# Altium PCB L-1K1W1007851A.PcbDoc
Units mm, origin at the board's own origin, x right, y up, seen from the top; angles counter-clockwise.
Board outline 50 x 50 mm, 2 copper layers (Top Layer, Bottom Layer), stack 1.58 mm thick; 57 components, 42 nets, 208 pads, 81 vias.
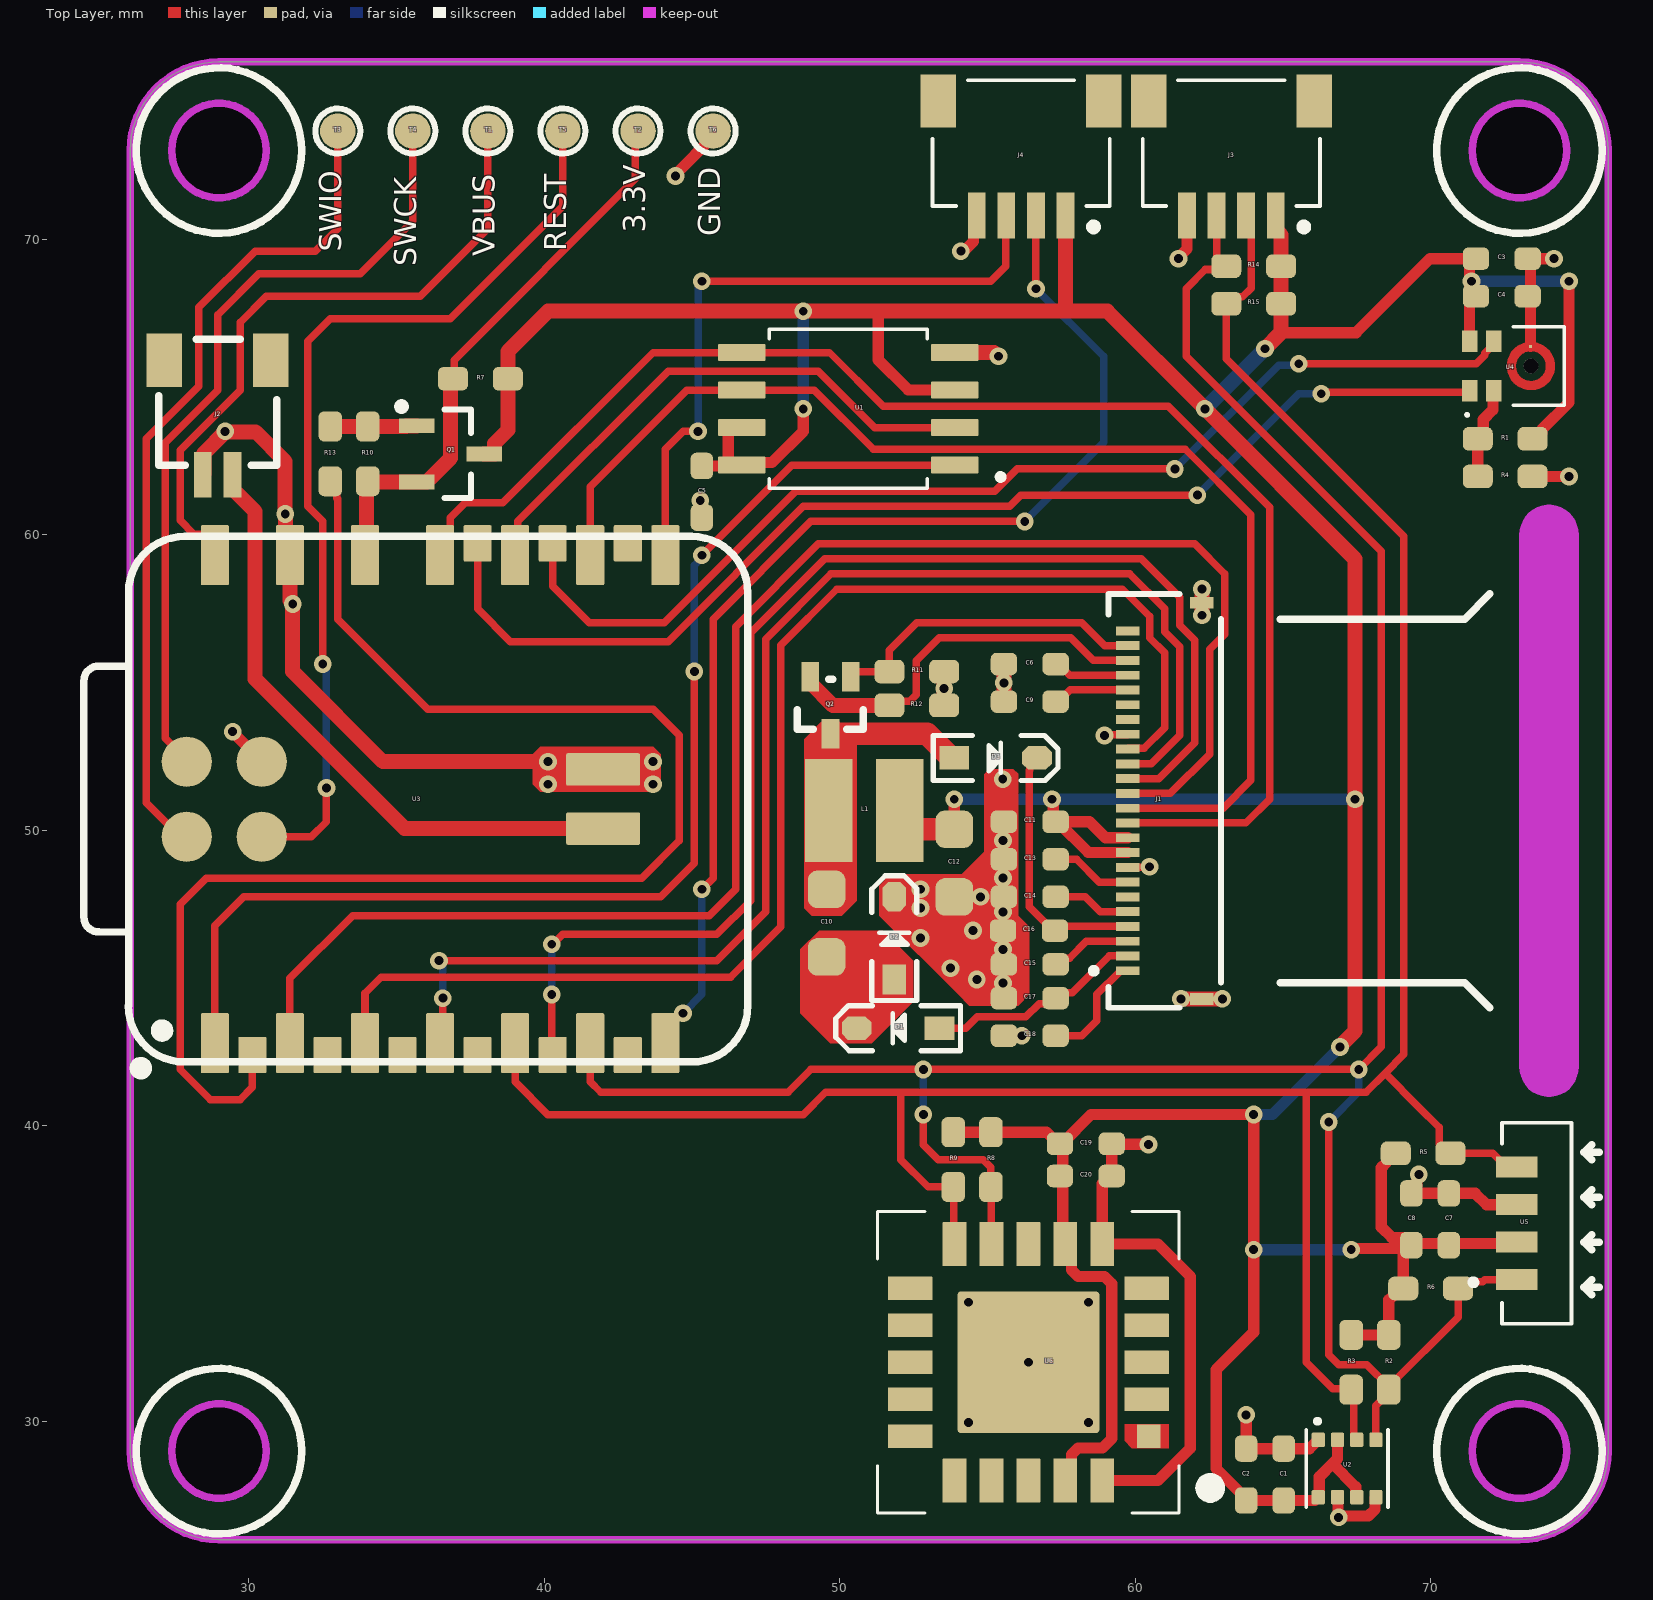
[diagram p0: Top Layer view]
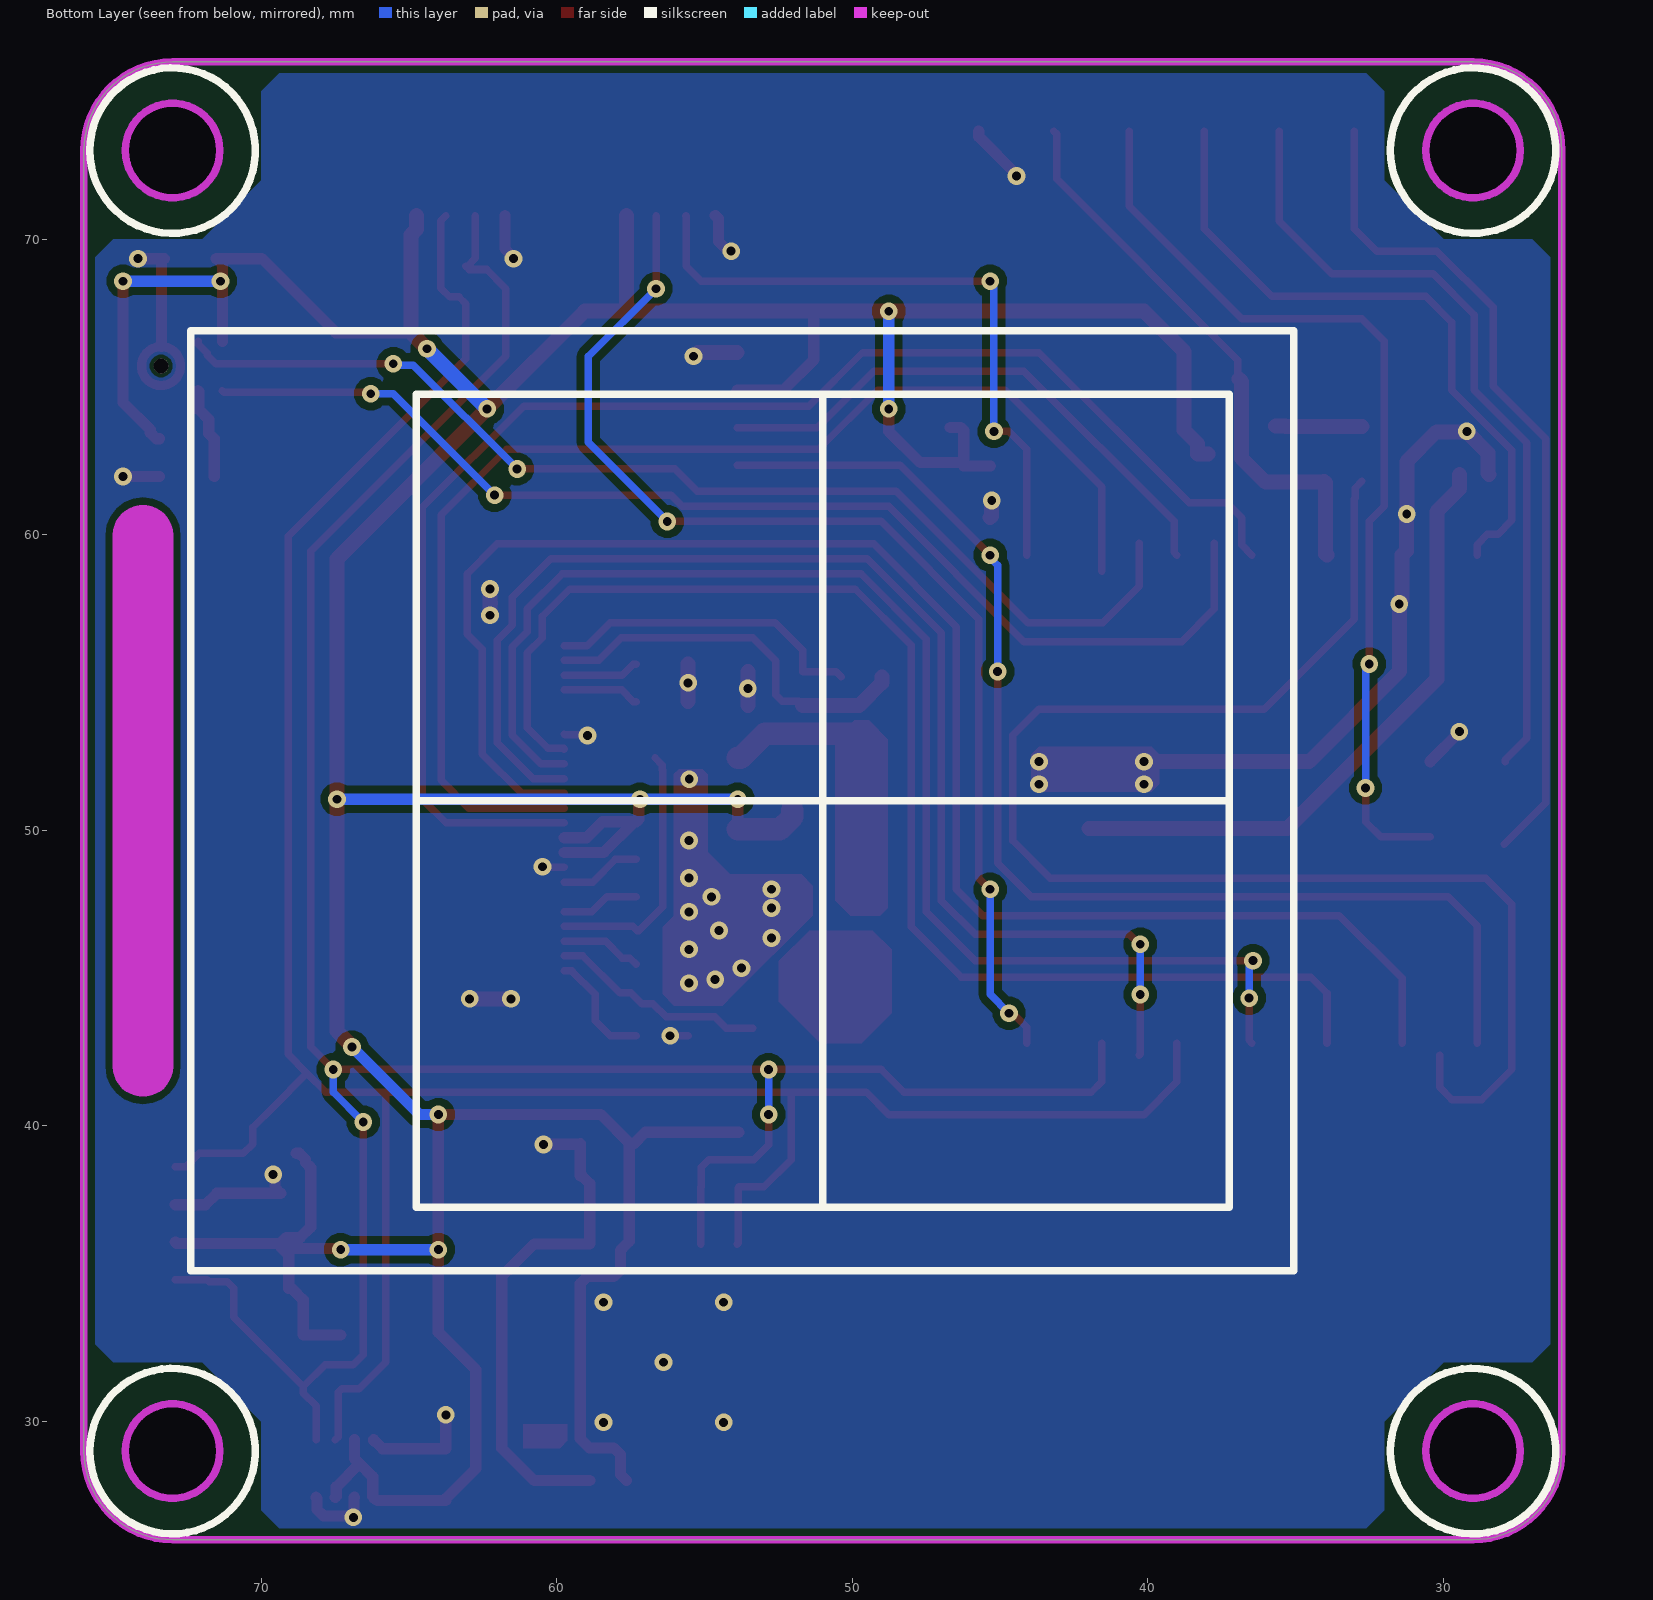
[diagram p1: Bottom Layer view, seen from below]
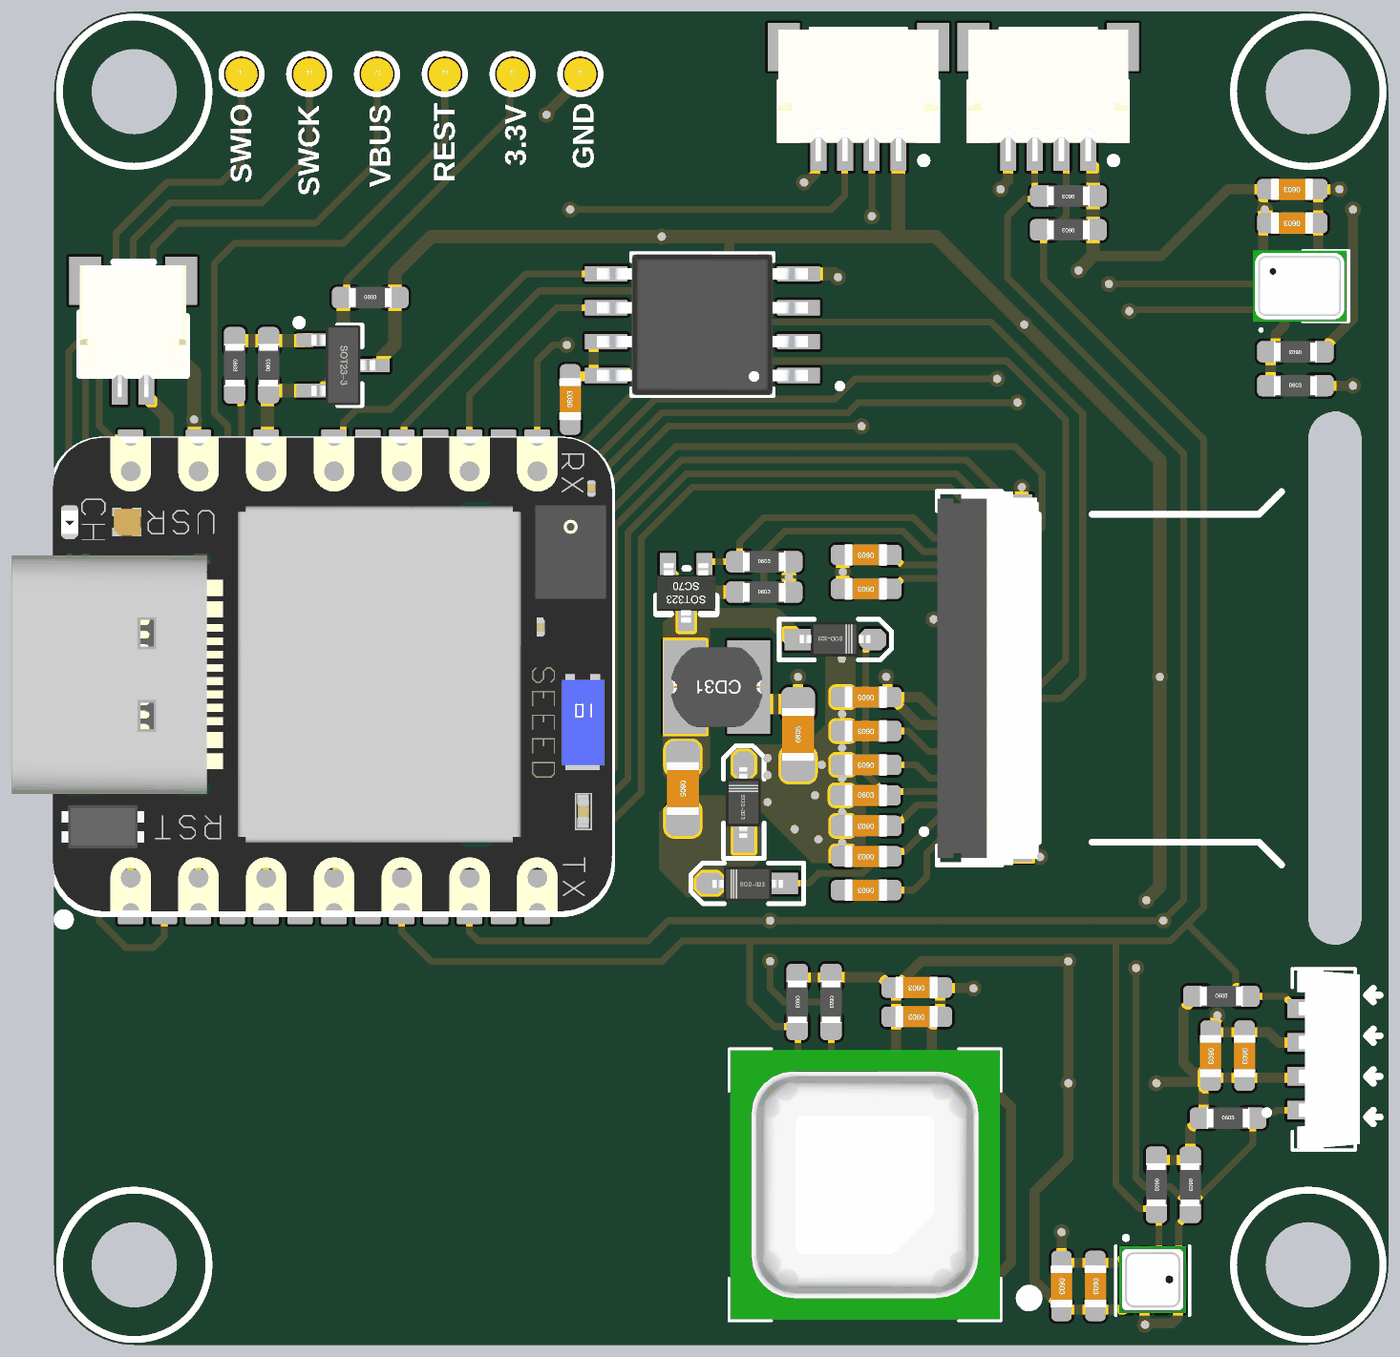
[diagram p2: 3D render of the assembled board from above, using the file's embedded part models]

## Layer stack, top to bottom
Top Solder: solder mask 0.0102, Solder Resist, Dk 3.5
Top Layer: signal copper 0.0356
Dielectric 1: dielectric 1.5086, FR-4, Dk 4.8
Bottom Layer: signal copper 0.0356
Bottom Solder: solder mask 0.0102, Solder Resist, Dk 3.5

## Board outline
26,29 26,73 cw(c29,73) 29,76 73,76 cw(c73,73) 76,73 76,29 cw(c73,29) 73,26 29,26 cw(c29,29)
cut-out: 73,42 ccw(c74,42) 75,42 75,60 ccw(c74,60) 73,60
cut-out: 71.4,73 cw(c73,73) 73,74.6 cw(c73,73) 74.6,73 cw(c73,73) 73,71.4 cw(c73,73)
cut-out: 73,30.6 cw(c73,29) 74.6,29 cw(c73,29) 73,27.4 cw(c73,29) 71.4,29 cw(c73,29)
cut-out: 30.6,29 cw(c29,29) 29,27.4 cw(c29,29) 27.4,29 cw(c29,29) 29,30.6 cw(c29,29)
cut-out: 29,71.4 cw(c29,73) 27.4,73 cw(c29,73) 29,74.6 cw(c29,73) 30.6,73 cw(c29,73)

## Design rules (kind name [scope] priority, off if disabled: settings)
Clearance [All] p1: gap=0.127 ignorepadtopadclearanceinfootprint=FALSE except(0.254: Arc-Poly Track-Poly SMDPad-Poly THPad-Poly Via-Poly Fill-Poly Poly-Poly)
PolygonConnect [All] p1: connectstyle=Direct reliefconductorwidth=0.254 reliefentries=4 polygonreliefangle="90 Angle" airgapwidth=0.254
RoutingVias [All] p1: holewidth=0.3 width=0.6 viastyle="Through Hole" minholewidth=0.3 minwidth=0.6 maxholewidth=0.3 maxwidth=0.6
SolderMaskExpansion [All] p1: expansion=0.102 istentingtop=FALSE
SupplyNets "Schematic Supply Nets_4" [InNet('VBUS')] p1: voltage=0.000
SupplyNets "Schematic Supply Nets_3" [InNet('+3.3V_PS')] p2: voltage=0.000
SupplyNets "Schematic Supply Nets_2" [InNet('GND')] p3: voltage=0.000
SupplyNets "Schematic Supply Nets_1" [InNet('VBAT')] p4: voltage=0.000
SupplyNets "Schematic Supply Nets" [InNet('+3.3V')] p5: voltage=0.000
Width [All] p1: maxlimit=25.4 minlimit=0.127 preferedwidth=0.254
30 further rules are at their usual default settings.

## Components (designator, comment, footprint, x,y, rotation, side; value= is the part's Value field where it differs from the comment)
C1 "0.1uF/50V" "C 0603" 65.024,28.194 r270 top value=30pF
C2 "10uF/10V" "C 0603" 63.754,28.194 r270 top value=30pF
C3 "0.1uF/50V" "C 0603" 72.39,69.342 r180 top value=30pF
C4 "10uF/10V" "C 0603" 72.39,68.072 r180 top value=30pF
C5 "0.1uF/50V" "C 0603" 45.339,61.468 r90 top value=30pF
C6 "1uF/50V" "C 0603" 56.42,55.626 r180 top value=30pF
C7 "0.1uF/50V" "C 0603" 70.612,36.83 r270 top value=30pF
C8 "10uF/10V" "C 0603" 69.342,36.83 r270 top value=30pF
C9 "1uF/50V" "C 0603" 56.42,54.356 r180 top value=30pF
C10 "4.7uF/50V" "C 0805" 49.562,46.863 r270 top value=30pF
C11 "1uF/50V" "C 0603" 56.42,50.292 r180 top value=30pF
C12 "4.7uF/50V" "C 0805" 53.88,48.895 r90 top value=30pF
C13 "1uF/50V" "C 0603" 56.42,49.022 r180 top value=30pF
C14 "1uF/50V" "C 0603" 56.42,47.752 r180 top value=30pF
C15 "1uF/50V" "C 0603" 56.42,45.466 r180 top value=30pF
C16 "1uF/50V" "C 0603" 56.42,46.609 r0 top value=30pF
C17 "1uF/50V" "C 0603" 56.42,44.323 r180 top value=30pF
C18 "1uF/50V" "C 0603" 56.42,43.053 r180 top value=30pF
C19 "0.1uF/50V" "C 0603" 58.318,39.399 r180 top value=30pF
C20 "10uF/10V" "C 0603" 58.318,38.307 r180 top value=30pF
D1 "MBR0530" SOD-323 51.978,43.307 r180 top
D2 "MBR0530" SOD-323 51.848,46.355 r90 top
D3 "MBR0530" SOD-323 55.277,52.451 r0 top
J1 "HC-FPC-05-09-24RLTAG" GCT_FFC2B28-24-G 61,51 r90 top
J2 "SM02B-SRSS-TB(LF)(SN)" SM02B-SRSS-TB(LF)(SN) 28.956,64.008 r180 top
J3 "SM04B-GHS-TB(LF)(SN)" JST_SM04B-SRSS-TB(LF)(SN) 63.252,70.801 r180 top
J4 "SM04B-GHS-TB(LF)(SN)" JST_SM04B-SRSS-TB(LF)(SN) 56.14,70.801 r180 top
L1 "10uH/1A" CD31 50.832,50.673 r180 top
Q1 "AO3401" SOT23-3N 36.83,62.738 r270 top
Q2 "SI1308EDL" SOT323 49.689,54.229 r180 top
R1 "NC" "R 0603" 72.517,63.246 r180 top
R2 "NC" "R 0603" 68.58,32.004 r270 top
R3 "NC" "R 0603" 67.31,32.004 r270 top
R4 "0R" "R 0603" 72.517,61.976 r0 top
R5 "NC" "R 0603" 69.742,39.074 r0 top
R6 "NC" "R 0603" 69.996,34.502 r0 top
R7 "NC" "R 0603" 37.846,65.278 r0 top
R8 "NC" "R 0603" 55.118,38.862 r270 top
R9 "NC" "R 0603" 53.848,38.862 r270 top
R10 "10K" "R 0603" 34.036,62.738 r90 top
R11 "1M" "R 0603" 52.61,55.372 r0 top
R12 "0.47R" "R 0603" 52.61,54.229 r0 top
R13 "100R" "R 0603" 32.766,62.738 r270 top
R14 "4.7K" "R 0603" 64.008,69.088 r180 top
R15 "4.7K" "R 0603" 64.008,67.818 r180 top
T1 "PAD 1.2mm" "TEST 1.2" 38.1,73.66 r180 top
T2 "PAD 1.2mm" "TEST 1.2" 43.18,73.66 r180 top
T3 "PAD 1.2mm" "TEST 1.2" 33.02,73.66 r180 top
T4 "PAD 1.2mm" "TEST 1.2" 35.56,73.66 r180 top
T5 "PAD 1.2mm" "TEST 1.2" 40.64,73.66 r180 top
T6 "PAD 1.2mm" "TEST 1.2" 45.72,73.66 r180 top
U1 "W25Q64JVSSIQ" SOIC127P790X216-8N 50.292,64.262 r180 top
U2 "BME280" PSON65P250X250X100-8N 67.168,28.409 r90 top
U3 "XIAO-nRF52840-Plus" XIAO-nRF52840-Plus 48.103,41.529 r90 top locked
U4 "SPH0641LU4H-1" MIC_SPH0641LU4H-1 73.388,65.711 r90 top
U5 "VEML7700-TR" XDCR_VEML7700-TR 73.582,36.707 r180 top
U6 "SCD41-D-R1" SCD4x 56.388,32.004 r180 top

## Footprints (in the part's own frame and the unit in brackets; to place one, negate y for a bottom-side part, rotate by r counter-clockwise, add the part's x,y. Pads: shape width x height; smd on the part's side, far side on the other; paste and mask are expansions set on the pad)
"C 0603" [mil] "无极性贴片电容"
  rrect50% 35x30 smd: 1(-35,0) 2(34,0)
  body extent -31,-16 31,16, height 32
"C 0805" [mil] "无极性贴片电容"
  rrect50% 50x50 smd: 1(-45,0) 2(45,0)
  body extent -39,-24 39,24, height 20
CD31 [mm] "3.5*3*1mm（长宽高）"
  rect 1.6x3.5 smd: 1(-1.2,0) 2(1.2,0)
  body extent -1.72,-1.5 1.72,1.5, height 1.2
GCT_FFC2B28-24-G [mm]
  rect 0.3x0.8 smd: 1(-5.75,1.25) 2(-5.25,1.25) 3(-4.75,1.25) 4(-4.25,1.25) 5(-3.75,1.25) 6(-3.25,1.25) 7(-2.75,1.25) 8(-2.25,1.25) 9(-1.75,1.25) 10(-1.25,1.25) 11(-0.75,1.25) 12(-0.25,1.25) 13(0.25,1.25) 14(0.75,1.25) 15(1.25,1.25) 16(1.75,1.25) 17(2.25,1.25) 18(2.75,1.25) 19(3.25,1.25) 20(3.75,1.25) 21(4.25,1.25) 22(4.75,1.25) 23(5.25,1.25) 24(5.75,1.25)
  rect 0.4x0.8 smd: S1(-6.7,-1.25) S2(6.7,-1.25)
  silkscreen extent -7,-1.9 7,2.5, body extent -7,-1.9 7,1.9, height 1.1
JST_SM04B-SRSS-TB(LF)(SN) [mm]
  rect 0.6x1.55 smd: 1(-1.5,0) 2(-0.5,0) 3(0.5,0) 4(1.5,0)
  rect 1.2x1.8 smd: S1(-2.8,-3.875) S2(2.8,-3.875)
  silkscreen extent -3,-4.57 3,0.48, body extent -3,-4.53 3,0.42, height 3.25
MIC_SPH0641LU4H-1 [mm]
  rect 0.725x0.522 smd mask+0.05: 1(-0.837,2.074) 2(-0.837,1.252) 4(0.837,1.252) 5(0.837,2.074)
  rect 0.1x0.1 smd paste-1 mask+0: 3(0.656,0.012)
  round 0.5 hole 0.5 unplated mask+0.65: ""(0,0)
  Top Layer region: 248 vertices and 0 holes, not listed, extent -0.81,-0.81 0.81,0.81
  silkscreen extent -1.7,-1.13 1.33,2.21, body extent -1.33,-1.04 1.33,2.46, height 1.08
PSON65P250X250X100-8N [mm]
  rrect25% 0.49x0.45 smd: 1(0.97,0.975) 2(0.97,0.325) 3(0.97,-0.325) 4(0.97,-0.975) 5(-0.97,-0.975) 6(-0.97,-0.325) 7(-0.97,0.325) 8(-0.97,0.975)
  silkscreen extent -1.3,-1.39 1.65,1.39, body extent -1.22,-1.25 1.28,1.25, height 0.94
"R 0603" [mil] "1/10W贴片电阻"
  rrect50% 40x31.5 smd: 1(-36.5,0) 2(36.5,0)
  body extent -31,-16 32,16, height 16
SCD4x [mm] "PQFN, 20-Leads, Body 10.10x10.10mm, Pitch 1.25mm, Thermal Pad 4.80x4.80mm, IPC Medium Density"
  rect 0.8x0.8 smd paste-0.7: 1(-4.075,2.5)
  rrect5% 1.5x0.8 smd paste-0.125: 2(-4,1.25) 3(-4,0) 4(-4,-1.25) 5(-4,-2.5) 11(4,-2.5) 12(4,-1.25) 13(4,0) 14(4,1.25) 15(4,2.5)
  rrect5% 0.8x1.5 smd paste-0.125: 6(-2.5,-4) 7(-1.25,-4) 8(0,-4) 9(1.25,-4) 10(2.5,-4) 16(2.5,4) 17(1.25,4) 18(0,4) 19(-1.25,4) 20(-2.5,4)
  rrect5% 4.8x4.8 smd paste-5 mask+0.1: 21(0,0)
  Top Layer region: -4.75,2.1 -4.75,2.9 -3.5,2.9 -3.25,2.65 -3.25,2.1
  silkscreen extent -6.65,-5.1 5.1,5.1, body extent -5.05,-5.05 5.05,5.05, height 6.28
SM02B-SRSS-TB(LF)(SN) [mm]
  rect 0.6x1.55 smd: 1(-0.5,1.975) 2(0.5,1.975)
  rect 1.2x1.8 smd: 3(-1.8,-1.9) 4(1.8,-1.9)
  silkscreen extent -2,-2.6 2,1.65, body extent -2,-2.47 2,2.47, height 2.95
SOD-323 [mm] "1.8x1.3X0.9mm（长宽高，不包括引脚）"
  rect 1x0.8 smd: 1(-1.4,0)
  oct 1x0.8 smd: 2(1.4,0)
  silkscreen extent -2.11,-0.76 2.11,0.76, body extent -1.34,-0.63 1.31,0.67, height 1
SOIC127P790X216-8N [mm]
  rrect15% 1.61x0.58 smd: 1(-3.605,1.905) 2(-3.605,0.635) 3(-3.605,-0.635) 4(-3.605,-1.905) 5(3.605,-1.905) 6(3.605,-0.635) 7(3.605,0.635) 8(3.605,1.905)
  silkscreen extent -5.25,-2.69 2.67,2.69, body extent -3.95,-2.64 3.95,2.64, height 2.16
SOT23-3N [mm] "3x1.3x1mm(长宽高)"
  rect 0.5x1.2 smd: 1(-0.95,-1.143) 2(0.95,-1.143) 3(0,1.143)
  silkscreen extent -1.72,-1.78 1.5,0.7, body extent -1.5,-1.2 1.5,1.2, height 1.05
SOT323 [mm]
  rect 0.6x1 smd: 1(-0.686,-0.965) 2(0.686,-0.965) 3(0,0.965)
  silkscreen extent -1.12,-0.89 1.12,0.81, body extent -1.09,-1.1 1.11,1.15, height 1.1
"TEST 1.2" [mm] "测试点1.2mm"
  round 1.2 smd paste-1.2: 1(0,0)
  silkscreen extent -0.76,-0.76 0.76,0.76
XDCR_VEML7700-TR [mm]
  rect 1.4x0.7 smd: 1(0.675,1.905) 2(0.675,0.635) 3(0.675,-0.635) 4(0.675,-1.905)
  silkscreen extent -1.17,-3.4 2.24,3.4, body extent -1.35,-3.4 1,3.4, height 3.02
XIAO-nRF52840-Plus [mm]
  rrect10% 2.032x0.95 smd: 1(1.27,19.241) 2(1.27,16.7) 3(1.27,14.16) 4(1.27,11.621) 5(1.27,9.08) 6(1.27,6.54) 7(1.27,4) 8(17.78,4.001) 9(17.78,6.541) 10(17.78,9.081) 11(17.78,11.621) 12(17.78,14.16) 13(17.78,16.7) 14(17.78,19.241)
  rrect10% 1.232x0.95 smd: 15(0.87,17.97) 16(0.87,15.43) 17(0.87,12.89) 18(0.87,10.351) 19(0.87,7.81) 20(0.87,5.271) 21(18.18,5.271) 22(18.18,7.811) 23(18.18,10.351)
  round 1.7 smd: 24(8.255,20.193) 25(10.795,20.193) 26(8.255,17.653) 27(10.795,17.653)
  rrect10% 1.1x2.5 smd: 28(8.531,6.103) 29(10.531,6.103)
  silkscreen extent 0.17,1.21 18.41,23.67, body extent 0.72,1.2 18.5,23.68, height 4.51

## Part data
C1 C2 C3 C4 C5 C6 C7 C8 C9 C10 C11 C12 C13 C14 C15 C16 C17 C18 C19 C20: library part CAP
D1 D2 D3: library part "D 1N4148", "High Conductance Fast Diode", Code_JEDEC=DO-204-AH, ComponentLink1Description="Manufacturer Link", ComponentLink1URL=http://www.fairchildsemi.com/, ComponentLink2Description=Datasheet, ComponentLink2URL=http://www.fairchildsemi.com/ds/1N%2F1N4148.pdf, DatasheetVersion=1997, LatestRevisionDate=17-Jul-2002, LatestRevisionNote="Re-released for DXP Platform.", PackageDescription="Diode, Axial; Body 3.8 x 1.9 mm (LxDia. max), Lead Dia. 0.53 mm (max)", PackageReference=DO-35, Published=8-Jun-2000, Publisher="Altium Limited"
J1: library part FFC2B28-24-G, "24 Position FFC, FPC Connector Contacts, Top and Bottom 0.020 (0.50mm) Surface Mount, Right Angle", Package=None, Check_prices=https://www.snapeda.com/parts/FFC2B28-24-G/Global+Connector+Technology/view-part/?ref=eda, MF="Global Connector Technology", MP=FFC2B28-24-G, SnapEDA_Link=https://www.snapeda.com/parts/FFC2B28-24-G/Global+Connector+Technology/view-part/?ref=snap
J2: "Connector Header Surface Mount, Right Angle 2 position 0.039 (1.00mm)", Package=None, Check_prices=https://www.snapeda.com/parts/SM02B-SRSS-TB(LF)(SN)/JST/view-part/?ref=eda, MF="JST Sales", MP=SM02B-SRSS-TB(LF)(SN), SnapEDA_Link=https://www.snapeda.com/parts/SM02B-SRSS-TB(LF)(SN)/JST/view-part/?ref=snap
J3 J4: "Connector Header Surface Mount, Right Angle 4 position 0.049 (1.25mm)", Package=None, Check_prices=https://www.snapeda.com/parts/SM04B-GHS-TB(LF)(SN)/JST/view-part/?ref=eda, MF="JST Sales America Inc.", MP=SM04B-GHS-TB(LF)(SN), SnapEDA_Link=https://www.snapeda.com/parts/SM04B-GHS-TB(LF)(SN)/JST/view-part/?ref=snap
L1: library part INDUCTOR
Q1: "P-Channel 30 V 4A (Ta) 1.4W (Ta) Surface Mount SOT-23-3", Package="SOT-23-3 Alpha &amp; Omega Semiconductor", Check_prices=https://www.snapeda.com/parts/AO3401/Alpha/view-part/?ref=eda, MF="Alpha & Omega Semiconductor", MP=AO3401, SnapEDA_Link=https://www.snapeda.com/parts/AO3401/Alpha/view-part/?ref=snap
Q2: library part AO3400, "N-Channel 30 V 5.8A (Ta) 1.4W (Ta) Surface Mount SOT-23-3", Package="SOT-23-3 Alpha &amp; Omega Semiconductor", Check_prices=https://www.snapeda.com/parts/AO3400/Alpha+%2526+Omega+Semiconductor+Inc./view-part/?ref=eda, MF="Alpha &", MP=AO3400, SnapEDA_Link=https://www.snapeda.com/parts/AO3400/Alpha+%2526+Omega+Semiconductor+Inc./view-part/?ref=snap
R1 R2 R3 R4 R5 R6 R7 R8 R9 R10 R11 R12 R13 R14 R15: library part RES2, "Resistor", LatestRevisionDate=17-Jul-2002, LatestRevisionNote="Re-released for DXP Platform.", PackageDescription="Axial Device, Thru-Hole; 2 Leads; 0.3 in Pin Spacing", PackageReference=AXIAL-0.3, Published=8-Jun-2000, Publisher="Altium Limited"
T1 T2 T3 T4 T5 T6: library part TEST
U1: library part W25Q64BVSSIG, "FLASH - NOR Memory IC 64Mb (8M x 8) SPI 80 MHz 8-SOIC", Package="SOIC-8 Winbond", Check_prices=https://www.snapeda.com/parts/W25Q64BVSSIG/Winbond/view-part/?ref=eda, MF="Winbond Electronics", MP=W25Q64BVSSIG, SnapEDA_Link=https://www.snapeda.com/parts/W25Q64BVSSIG/Winbond/view-part/?ref=snap
U2: "DIGITAL HUMIDITY, PRESSURE AND TEMPERATURE SENSOR<br>* Digital interface IÂ²C (up to 3.4 MHz) and SPI (3 and 4 wire, up to 10 MHz)* Supply voltage VDD main supply voltage range: 1.71 V to 3.6 V*VDDIO interface voltage range: 1.2 V to 3.6 V<br> Operating range -40â€", Package=None, Availability=Unavailable, MP=BME280, Price=None
U4: "100 Hz ~ 80 kHz Digital, PDM Microphone MEMS (Silicon) 1.62 V ~ 3.6 V Omnidirectional (-26dB Â±1dB @ 94dB SPL) Solder Pads", Package=None, Availability="In Stock", Check_prices=https://www.snapeda.com/parts/SPH0641LU4H-1/Knowles/view-part/?ref=eda, MF=Knowles, MP=SPH0641LU4H-1, Price=None, Purchase-URL=https://pricing.snapeda.com/search/part/SPH0641LU4H-1/?ref=eda, SnapEDA_Link=https://www.snapeda.com/parts/SPH0641LU4H-1/Knowles/view-part/?ref=snap
U5: "Optical Sensor Ambient 545nm I2C 4-SMD, J-Lead", Package=Package, Check_prices=https://www.snapeda.com/parts/VEML7700-TR/Vishay+Semiconductor+Opto+Division/view-part/?ref=eda, MF=Vishay, MP=VEML7700-TR, SnapEDA_Link=https://www.snapeda.com/parts/VEML7700-TR/Vishay+Semiconductor+Opto+Division/view-part/?ref=snap
U6: library part SCD4x

## Via types
v1: diameter 0.6, hole 0.3, Top Layer to Bottom Layer, tented both sides, 81 vias

## Nets (pads, with @x,y where several pads share a name; then routed paths per layer and width w, separated by ;. In a path a pad name is that pad's centre, name@x,y a point inside that pad or via, vN(x,y) a via of type N, cw(c..) or ccw(c..) an arc to the next point about the centre after c; other vN are vias at no path point)
3V3ON: R13.2 U3.15 | length 49
  Top Layer w0.254: U3.15 30.132,41.308 29.718,40.894 28.702,40.894 27.686,41.91 27.686,47.498 28.575,48.387 43.307,48.387 44.577,49.657 44.577,53.213 43.688,54.102 36.068,54.102 33.02,57.15 33.02,61.214 32.994,61.24 32.994,61.583 R13.2
+3.3V: C1.2 C2.2 C3.2 C4.2 C5.2 C7.2 C8.2 C11.1 C12.2 C19.2 C20.2 J1.9 J1.10 J3.1 J4.1 L1.1 Q1.3 R1.1 R2.1 R3.1 R5.1 R6.1 R7.2 R8.1 R9.1 R14.1 R15.1 U1.3 U1.7 U1.8 U2.2 U2.6 U2.8 U4.5 U5.2 U6.7 U6.19 | length 187.8
  Top Layer w0.381: C5.2 46.228,62.332 46.342,62.446 47.714,62.446 48.768,63.5 v1(48.768,64.262) ; U1.8@46.228,62.357 46.228,63.528 46.327,63.627 U1.7 ; 51.308,67.564 51.308,65.913 52.324,64.897 U1.3 ; R9.1 53.853,39.784 R8.1@55.118,39.784 ; C12.2 v1(53.88,51.054) ; R8.1 57,39.789 57.391,39.399 C19.2 57.518,39.399 58.505,40.386 v1(64.008,40.386) v1(64.008,35.814) 64.008,33.02 62.738,31.75 62.738,28.41 63.754,27.394 C2.2 C1.2 66.084,27.33 66.139,27.385 66.159,27.385 66.193,27.419 U2.8 66.228,27.474 66.228,28.128 66.675,28.575 ; v1(57.182,51.054) 57.224,51.012 57.224,50.377 C11.1 58.452,50.292 58.994,49.75 J1.10 ; C11.1@57.372,50.292 58.414,49.25 J1.9 ; C19.2@57.546,39.399 57.546,36.096 U6.7 57.848,35.794 57.848,35.129 58.071,34.906 58.961,34.906 59.21,34.657 59.21,29.425 58.888,29.102 58.071,29.102 57.848,28.879 57.848,28.214 U6.19 ; 64.935,66.84 67.475,66.84 69.977,69.342 C3.2 71.505,69.342 71.314,69.151 U4.5 ; U2.2 66.843,28.743 66.675,28.575 ; R3.1 R2.1 68.58,34.116 68.966,34.502 R6.1 69.069,35.63 69.342,35.903 C8.2 ; v1(67.31,35.814) 67.352,35.856 69.232,35.856 C8.2 ; U2.6 67.459,27.474 67.459,27.791 66.675,28.575 ; R5.1 68.712,39.074 68.503,38.865 68.503,38.762 68.326,38.585 68.326,36.576 68.682,36.22 69.151,36.22 69.342,36.03 C8.2 ; U5.2 72.854,36.019 69.395,36.019 C8.2 ; R1.1 73.547,63.246 73.756,63.455 73.756,63.558 74.676,64.478 v1(74.676,68.58)
  Top Layer w0.508: Q1.3 38.315,62.738 38.319,62.742 38.319,63.084 38.773,63.538 R7.2 38.773,66.205 40.132,67.564 v1(48.768,67.564) 51.308,67.564 57.658,67.564 ; J4.1 57.64,67.582 57.658,67.564 ; v1(64.389,66.294) 64.935,66.84 R15.1 R14.1 64.935,70.143 64.752,70.326 J3.1 ; v1(66.929,42.672) 66.929,42.697 67.437,43.205 v1(67.437,51.054) 67.437,59.182 v1(62.357,64.262) 59.055,67.564 57.658,67.564
  Top Layer w0.762: L1.1 52.032,50.457 52.451,50.038 C12.2
  Bottom Layer w0.381: v1(48.768,64.262) v1(48.768,67.564) ; v1(53.88,51.054) v1(57.182,51.054) v1(67.437,51.054) ; v1(64.008,35.814) v1(67.31,35.814) ; v1(64.008,40.386) 64.643,40.386 v1(66.929,42.672) ; v1(71.374,68.58) v1(74.676,68.58)
  Bottom Layer w0.508: v1(62.357,64.262) v1(64.389,66.294)
+3.3V_PS: Q1.2 R7.1 R10.1 T2.1 U3.12 | length 19.4
  Top Layer w0.254: R7.1 36.954,65.313 36.954,65.91 43.088,72.044 43.088,73.568 T2.1
  Top Layer w0.508: U3.12 33.989,59.356 33.989,61.764 R10.1 34.055,61.792 35.683,61.792 Q1.2 36.029,61.788 36.833,62.592 36.833,65.193 R7.1
BME_SCL: J3.3 R2.2 R6.2 R8.2 R14.2 U2.4 U3.6 U5.1 U6.9 | length 89.5
  Top Layer w0.254: U3.6 41.562,41.496 41.91,41.148 48.26,41.148 49.022,41.91 v1(67.564,41.91) 68.326,42.672 68.326,59.436 61.722,66.04 61.722,68.326 62.372,68.976 62.969,68.976 R14.2 63.019,69.088 62.752,69.355 J3.3 ; v1(52.832,40.386) 52.832,39.37 53.34,38.862 54.864,38.862 55.118,38.608 R8.2 55.128,37.925 55.128,36.014 U6.9 ; v1(66.548,40.132) 66.548,32.258 66.882,31.924 67.841,31.924 R2.2@68.58,31.185 ; U2.4 68.143,30.527 68.58,30.964 R2.2 R2.2@68.58,31.185 ; U5.1 71.826,34.802 71.753,34.73 71.151,34.73 R6.2 70.923,33.528 R2.2@68.58,31.185
  Bottom Layer w0.254: v1(52.832,40.386) v1(52.832,41.91) ; v1(66.548,40.132) 67.564,41.148 v1(67.564,41.91)
BME_SDA: J3.2 R3.2 R5.2 R9.2 R15.2 U2.3 U3.5 U5.4 U6.10 | length 89.5
  Top Layer w0.254: U3.5 39.022,41.496 40.132,40.386 48.768,40.386 49.53,41.148 52.07,41.148 ; U6.10 53.868,36.024 53.868,37.915 R9.2 52.997,37.935 52.07,38.862 52.07,41.148 ; J3.2 63.925,70.628 63.925,70.008 63.929,70.004 63.929,68.348 63.627,68.046 63.309,68.046 R15.2 63.081,65.951 69.088,59.944 69.088,42.418 68.453,41.783 ; U2.3 67.402,29.471 67.402,30.985 67.275,31.112 66.678,31.112 65.786,32.004 65.786,41.148 ; U5.4 72.557,38.612 72.096,39.074 70.601,39.074 70.288,39.387 70.288,39.948 69.596,40.64 68.453,41.783 ; 52.07,41.148 65.278,41.148 65.786,41.148 ; 65.786,41.148 67.818,41.148 68.453,41.783
C_RX: J4.3 U3.8 | length 22.3
  Top Layer w0.254: U3.8 44.102,62.898 44.704,63.5 v1(45.212,63.5) ; v1(45.339,68.58) 55.118,68.58 55.626,69.088 55.626,70.787 J4.3
  Bottom Layer w0.254: v1(45.212,63.5) 45.212,68.359 45.339,68.486 v1(45.339,68.58)
C_TX: J4.2 U3.7 | length 39.4
  Top Layer w0.254: U3.7 44.102,43.34 44.511,43.749 44.638,43.749 v1(44.704,43.815) ; v1(45.339,48.006) 45.72,48.387 45.72,57.15 49.022,60.452 v1(56.261,60.452) ; J4.2 56.641,70.8 v1(56.642,68.326) v1(56.642,68.326)
  Bottom Layer w0.254: v1(44.704,43.815) 45.339,44.45 v1(45.339,48.006) ; v1(56.261,60.452) 58.935,63.126 58.935,66.033 v1(56.642,68.326)
ED_BUSY: J1.16 U3.3 | length 45.4
  Top Layer w0.254: U3.3 33.942,44.483 34.498,45.039 46.309,45.039 48.006,46.736 48.006,56.261 49.911,58.166 59.563,58.166 60.484,57.245 60.484,56.515 60.992,56.007 60.992,53.467 60.298,52.773 59.773,52.773 J1.16
ED_CS: J1.13 U3.2 | length 55.2
  Top Layer w0.254: U3.2 31.402,44.991 33.528,47.117 45.593,47.117 46.482,48.006 46.482,56.892 49.28,59.69 62.008,59.69 63.024,58.674 63.024,56.642 62.516,56.134 62.516,52.578 61.188,51.25 J1.13
ED_DC: J1.14 U3.19 | length 44.1
  Top Layer w0.254: v1(40.259,44.45) 40.259,42.432 U3.19 ; v1(40.259,46.147) 40.298,46.147 40.633,46.482 45.847,46.482 46.99,47.625 46.99,56.682 49.49,59.182 60.198,59.182 61.5,57.88 61.5,56.936 62.008,56.428 62.008,52.959 60.799,51.75 J1.14
  Bottom Layer w0.254: v1(40.259,44.45) v1(40.259,46.147)
ED_DI: J1.11 U1.5 U3.11 | length 48.6
  Top Layer w0.254: U3.11 36.83,59.657 36.83,60.579 37.338,61.087 38.608,61.087 43.688,66.167 U1.5 49.657,66.167 51.471,64.353 61.123,64.353 64.548,60.928 64.548,51.054 63.744,50.25 J1.11
ED_RES: J1.15 U3.4 | length 45.4
  Top Layer w0.254: v1(36.449,45.593) 45.847,45.593 47.498,47.244 47.498,56.471 49.701,58.674 59.817,58.674 60.992,57.499 60.992,56.725 61.5,56.217 61.5,53.213 60.537,52.25 J1.15 ; U3.4 36.576,42.893 v1(36.576,44.323)
  Bottom Layer w0.254: v1(36.449,45.593) 36.449,45.499 36.576,45.372 v1(36.576,44.323)
ED_SCLK: J1.12 U1.6 U3.9 | length 41.9
  Top Layer w0.254: U3.9@41.562,58.768 U3.9 41.562,61.628 44.831,64.897 U1.6 49.149,64.897 51.144,62.902 61.685,62.902 63.913,60.674 63.913,51.689 62.974,50.75 J1.12
GDR: J1.23 Q2.1 R11.1 | length 10.9
  Top Layer w0.254: Q2.1 50.375,55.199 50.548,55.372 R11.1 51.683,56.096 52.61,57.023 58.198,57.023 58.971,56.25 J1.23
GND: C1.1 C2.1 C3.1 C4.1 C5.1 C6.2 C7.1 C8.1 C9.2 C11.2 C12.1 C13.2 C14.2 C15.2 C16.1 C17.2 C18.2 C19.1 C20.1 D2.2 J1.8 J1.17 J1.S1 J1.S2 J2.2 J3.4 J4.4 R4.2 R11.2 R12.2 T6.1 U1.4 U2.1 U2.5 U2.7 U3.13 U3.27 U3.29 U4.3 U5.3 U6.6 U6.20 U6.21 | length 70.2
  Top Layer w0.254: C18.2 v1(56.166,43.053) ; v1(58.96,53.213) 58.978,53.231 59.731,53.231 J1.17 ; J1.8 59.759,48.759 60.475,48.759 v1(60.484,48.768)
  Top Layer w0.381: v1(29.464,53.34) 29.464,53.325 30.45,52.339 U3.27 ; v1(44.45,72.136) 44.45,72.195 45.72,73.465 T6.1 ; v1(54.102,69.596) 54.144,69.638 54.24,69.638 54.531,69.929 54.531,70.691 J4.4 ; U6.20 60.77,28.004 61.864,29.098 61.864,34.91 60.77,36.004 U6.6 58.888,38.051 59.143,38.307 C20.1 C19.1 59.221,39.384 60.438,39.384 v1(60.452,39.37) ; v1(61.468,69.342) 61.468,69.382 61.752,69.666 J3.4 ; v1(63.754,30.226) C2.1 C1.1 65.897,29.083 66.139,29.325 66.159,29.325 66.193,29.359 U2.1 ; U2.7 66.863,27.42 66.863,26.778 v1(66.883,26.759) 66.925,26.801 67.886,26.801 68.109,27.024 68.109,27.405 U2.5 ; v1(69.596,38.354) 69.596,38.295 69.532,38.231 69.532,37.91 C8.1 C7.1 71.501,37.719 71.882,37.338 72.903,37.338 U5.3 ; U4.3 73.375,69.246 C3.1 v1(74.168,69.342) ; R4.2 v1(74.676,61.976)
  Top Layer w0.508: J2.2 28.502,62.079 28.502,62.767 29.21,63.475 v1(29.21,63.5) 29.228,63.482 30.244,63.482 31.242,62.484 v1(31.242,60.706) 31.26,60.688 31.26,59.452 U3.13 31.402,57.777 31.496,57.683 v1(31.496,57.658) 31.496,55.372 34.544,52.324 v1(40.132,52.324) ; v1(45.283,61.158) 45.301,61.141 45.301,60.617 C5.1 ; R12.2 v1(53.537,54.8) R11.2 ; U1.4 55.22,66.167 55.347,66.04 v1(55.372,66.04) ; C9.2 v1(55.556,54.991) C6.2 ; v1@61.563,44.289 v1(61.551,44.3) v1(62.948,44.3) ; v1(62.262,57.277) 62.256,57.283 62.256,57.694 J1.S2 62.256,57.706 62.256,58.16 v1(62.262,58.166)
  other v1: 54.356,29.972 58.42,29.972 56.388,32.004 54.356,34.036 58.42,34.036 55.531,44.831 54.642,44.958 53.753,45.339 55.531,45.974 52.737,46.355 54.515,46.609 55.531,47.244 52.737,47.371 54.769,47.752 52.737,48.006 55.531,48.387 55.531,49.657 40.132,51.562 43.688,51.562 55.518,51.734 43.688,52.324
NetC6_1: C6.1 J1.21 | length 2.6
  Top Layer w0.254: C6.1 57.407,55.626 57.783,55.25 J1.21
NetC9_1: C9.1 J1.20 | length 2.6
  Top Layer w0.254: C9.1 57.407,54.356 57.801,54.75 J1.20
NetC10_1: C10.1 D3.1 L1.2 Q2.3 | length 4.5
  Top Layer w0.762: Q2.3 52.964,53.264 53.777,52.451 D3.1
NetC10_2: C10.2 D1.2 D2.1 | length 0.1
  Top Layer w0.508: D2.1 D2.1@51.848,45.055
NetC13_1: C13.1 J1.7 | length 2.8
  Top Layer w0.254: C13.1 58.014,49.022 58.786,48.25 J1.7
NetC14_1: C14.1 J1.5 | length 2.6
  Top Layer w0.254: C14.1 58.31,47.752 58.812,47.25 J1.5
NetC15_1: C15.1 J1.3 | length 2.8
  Top Layer w0.254: C15.1 57.524,45.681 57.778,45.681 58.347,46.25 J1.3
NetQ1_1: Q1.1 R10.2 R13.1 | length 2.9
  Top Layer w0.508: R13.1 35.322,63.665 35.345,63.688 Q1.1
NetR1_2: R1.2 R4.1 U4.2 | length 3.1
  Top Layer w0.381: R4.1 R1.2 71.773,63.43 71.773,63.899 72.107,64.233 72.107,64.844 U4.2
P0.02: U1.1 U3.1 | length 41.4
  Top Layer w0.254: U3.1 28.862,46.769 29.845,47.752 43.942,47.752 45.085,48.895 v1(45.085,55.372) ; v1(45.339,59.309) 48.387,62.357 U1.1
  Bottom Layer w0.254: v1(45.085,55.372) 45.085,58.961 45.339,59.215 v1(45.339,59.309)
P0.09: U3.18
P0.19: U3.16
P0.31: U3.20
P1.01: U3.17
P1.03: U3.21
P1.05: U3.22 U4.4 | length 37.8
  Top Layer w0.254: U3.22 40.292,58.26 41.529,57.023 44.069,57.023 48.514,61.468 55.245,61.468 56.007,62.23 v1(61.341,62.23) ; v1(65.532,65.786) 71.535,65.786 71.829,66.08 71.829,66.139 72.136,66.446 U4.4
  Bottom Layer w0.254: v1(61.341,62.23) 64.851,65.74 65.486,65.74 v1(65.532,65.786)
P1.07: U3.23 U4.1 | length 39.7
  Top Layer w0.254: U3.23 37.752,57.498 38.862,56.388 44.196,56.388 48.768,60.96 55.753,60.96 56.134,61.341 v1(62.103,61.341) ; v1(66.294,64.77) 66.346,64.822 71.262,64.822 U4.1
  Bottom Layer w0.254: v1(62.103,61.341) 65.532,64.77 v1(66.294,64.77)
P1.14: U1.2 U3.10 | length 18.9
  Top Layer w0.254: U3.10 39.116,59.403 39.116,60.452 44.196,65.532 49.276,65.532 51.181,63.627 U1.2
PREVGH: C16.2 D3.2 J1.4 | length 8.9
  Top Layer w0.254: D3.2 56.43,52.204 56.43,52.039 56.42,52.029 56.42,47.409 57.22,46.609 C16.2 57.425,46.75 J1.4
PREVGL: C17.1 D1.1 J1.2 | length 7.4
  Top Layer w0.254: D1.1 54.273,43.307 54.654,43.688 56.293,43.688 56.746,44.141 57.127,44.141 C17.1 57.491,44.505 57.872,44.505 59.117,45.75 J1.2
RESE: J1.22 Q2.2 R12.1 | length 13.2
  Top Layer w0.254: R12.1 51.821,54.367 52.367,54.367 52.591,54.591 52.591,55.734 53.372,56.515 57.817,56.515 58.582,55.75 J1.22
  Top Layer w0.508: Q2.2 49.003,54.994 49.768,54.229 R12.1
REST: T5.1 U3.26 | length 32
  Top Layer w0.254: U3.26 32.131,49.784 32.639,50.292 v1(32.639,51.435) ; v1(32.512,55.626) 32.512,60.452 32.004,60.96 32.004,66.548 32.766,67.31 36.83,67.31 40.64,71.12 T5.1
  Bottom Layer w0.254: v1(32.512,55.626) 32.512,55.532 32.639,55.405 v1(32.639,51.435)
SWDCLK: T4.1 U3.25 | length 27.1
  Top Layer w0.254: U3.25 27.91,52.391 27.178,53.123 27.178,63.119 28.956,64.897 28.956,67.437 30.353,68.834 33.782,68.834 35.56,70.612 T4.1
SWDIO: T3.1 U3.24 | length 28.6
  Top Layer w0.254: U3.24@27.94,49.53 26.543,50.927 26.543,63.246 28.321,65.024 28.321,67.691 30.226,69.596 32.258,69.596 33.02,70.358 T3.1
VBAT: J2.1 U3.28 | length 21.1
  Top Layer w0.508: J2.1 29.456,61.558 30.226,60.788 30.226,55.118 35.284,50.06 U3.28
VBUS: T1.1 U3.14 | length 22.4
  Top Layer w0.254: U3.14 28.862,59.668 28.514,60.016 28.155,60.016 27.686,60.485 27.686,62.865 29.718,64.897 29.718,67.183 30.607,68.072 35.814,68.072 38.1,70.358 T1.1
VCOM: C18.1 J1.1 | length 3.9
  Top Layer w0.254: C18.1 58.198,43.053 58.706,43.561 58.706,44.45 59.477,45.221 59.477,45.227 59.5,45.25 J1.1
pads on no net: J1.6 J1.18 J1.19 J1.24 J2.3 J2.4 J3.S1 J3.S2 J4.S1 J4.S2 U4. U6.1 U6.2 U6.3 U6.4 U6.5 U6.8 U6.11 U6.12 U6.13 U6.14 U6.15 U6.16 U6.17 U6.18

## Polygon pours and split planes (outlines as drawn)
GND on Bottom Layer "GND_L-01_P-001" (solid, remove dead copper, pour order 0): 33,76 32,75 32,72 30,70 27,70 26,69 26,33 27,32 30,32 32,30 32,27 33,26 69,26 70,27 70,30 72,32 75,32 76,33 76,69 75,70 72,70 70,72 70,75 69,76

## Keep-outs
Keep-Out Layer:
  circle w0.254: c73,73 r1.6
  circle w0.254: c73,29 r1.6
  circle w0.254: c29,29 r1.6
  circle w0.254: c29,73 r1.6
  lines w0.254: 26,29 ccw(c29,29) 29,26 73,26 ccw(c73,29) 76,29 76,73 ccw(c73,73) 73,76 29,76 ccw(c29,73) 26,73 26,29
  lines w2: 74,42 74,60

## Other copper
Top Layer:
  region net GND: 54.896,49.276 54.134,48.514 51.721,48.514 51.34,48.133 51.34,47.117 54.007,44.45 54.388,44.069 56.039,44.069 56.42,44.45 56.42,46.736 56.039,47.117 56.039,51.911 55.88,52.07 55.07,52.07 54.896,51.896
  region net GND: 39.878,52.832 43.688,52.832 43.942,52.578 43.942,51.562 43.688,51.308 39.878,51.308 39.624,51.562 39.624,52.578
  region net NetC10_1: 49.435,53.721 48.8,53.086 48.8,47.371 49.054,47.117 50.07,47.117 50.578,47.625 50.578,53.086 49.943,53.721
  region net NetC10_2: 49.308,46.609 51.467,46.609 52.483,45.593 52.483,44.196 51.086,42.799 49.689,42.799 48.673,43.815 48.673,45.974

## Silkscreen, mask and mechanical layers (free items; w line width, h text height)
Top Overlay:
  circle w0.254: c73,73 r2.8
  circle w0.254: c73,29 r2.8
  circle w0.254: c29,29 r2.8
  circle w0.254: c29,73 r2.8
  lines w0.254: 64.9,44.85 71.15,44.85 72,44 ; 64.9,57.15 71.15,57.15 72,58 ; 75.438,34.29 75.184,34.544 ; 75.438,34.798 75.184,34.544 ; 75.438,35.814 75.184,36.068 ; 75.438,36.322 75.184,36.068 ; 75.438,37.338 75.184,37.592 ; 75.438,37.846 75.184,37.592 ; 75.438,38.862 75.184,39.116 ; 75.438,39.37 75.184,39.116 ; 75.692,34.544 75.184,34.544 ; 75.692,36.068 75.184,36.068 ; 75.692,37.592 75.184,37.592 ; 75.692,39.116 75.184,39.116
  text "3.3V" at 43.673,70.223 h1.27 r90
  text "GND" at 46.213,70.103 h1.27 r90
  text "REST" at 41.006,69.593 h1.27 r90
  text "SWIO" at 33.386,69.573 h1.27 r90
  text "VBUS" at 38.593,69.416 h1.27 r90
  text "SWCK" at 35.926,69.088 h1.27 r90
Bottom Overlay:
  circle w0.254: c73,73 r2.8
  circle w0.254: c73,29 r2.8
  circle w0.254: c29,29 r2.8
  circle w0.254: c29,73 r2.8
  lines w0.254: 37.25,51 64.75,51 ; 51,37.25 51,64.75 ; 35.069,35.106 72.389,35.106 72.389,66.906 35.069,66.906 35.069,35.106 ; 37.25,37.25 37.25,64.75 64.75,64.75 64.75,37.25 37.25,37.25
Mechanical 13:
  circle w0.1: c51,51 r1.487
  lines w0.1: 32.34,51 69.66,51 ; 51,35.1 51,66.9
Mechanical 15:
  lines w0.1: 26,51 76,51 ; 51,26 51,76

## Dimensions
73,73 to 77,77 on Mechanical 13
73,73 to 73,73 on Mechanical 13
73,76 to 73,26 on Mechanical 13
26,73 to 76,73 on Mechanical 13